# Altium PCB pool_mesurement_PCB.PcbDoc
Units mm, origin at the board's own origin, x right, y up, seen from the top; angles counter-clockwise.
Board outline 60.5 x 41.5 mm, 2 copper layers (Top Layer, Bottom Layer); 36 components, 37 nets, 192 pads, 78 vias.
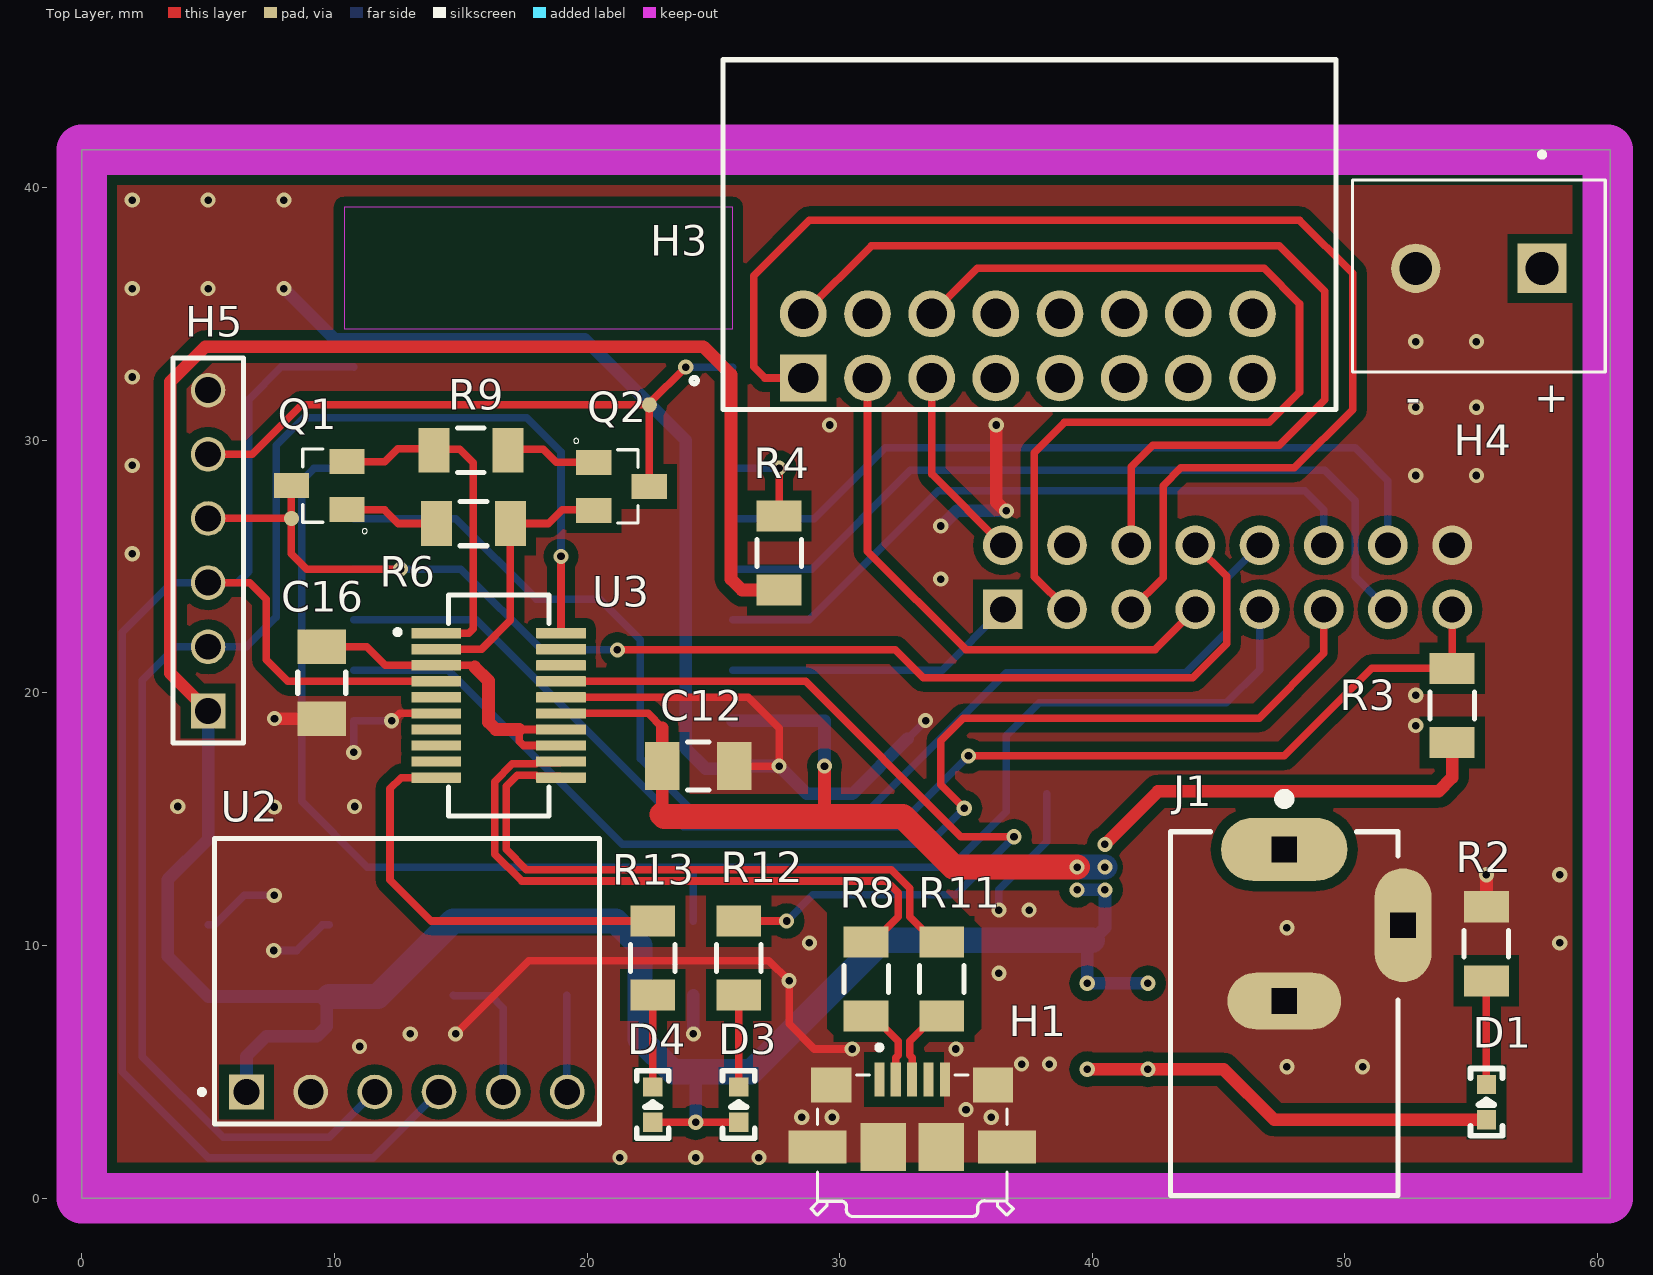
[diagram p0: Top Layer view]
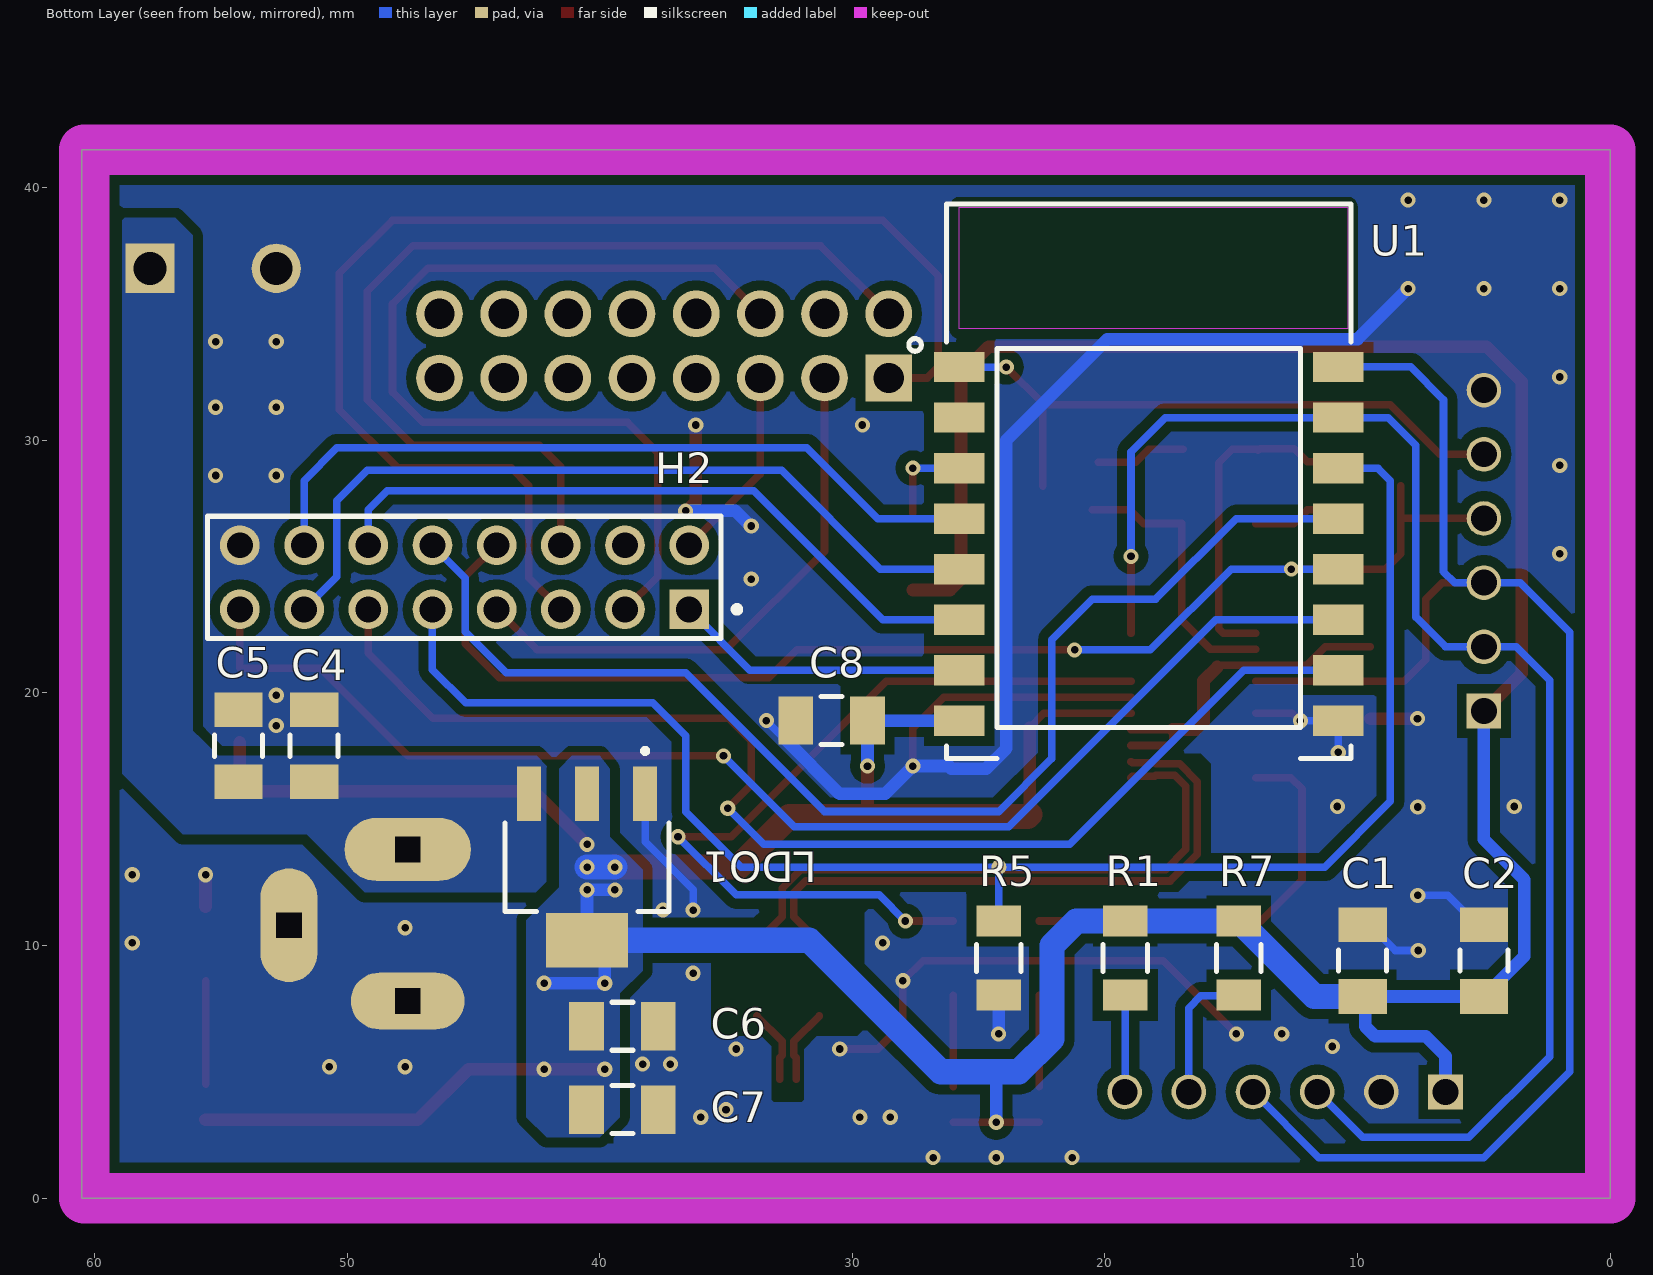
[diagram p1: Bottom Layer view, seen from below]
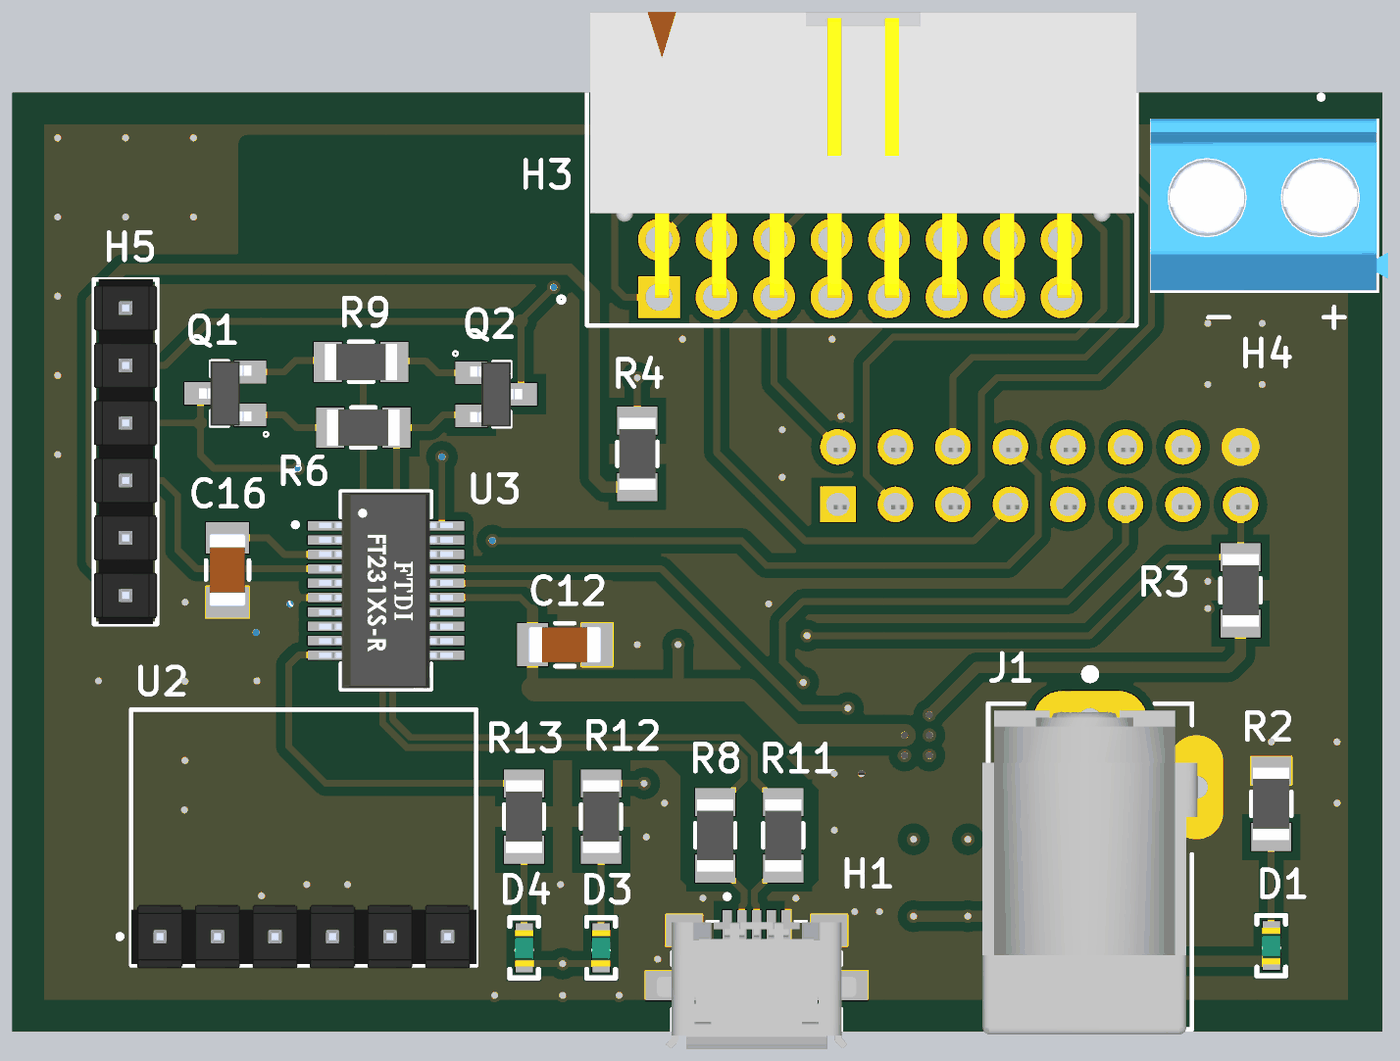
[diagram p2: 3D render of the assembled board from above, using the file's embedded part models]
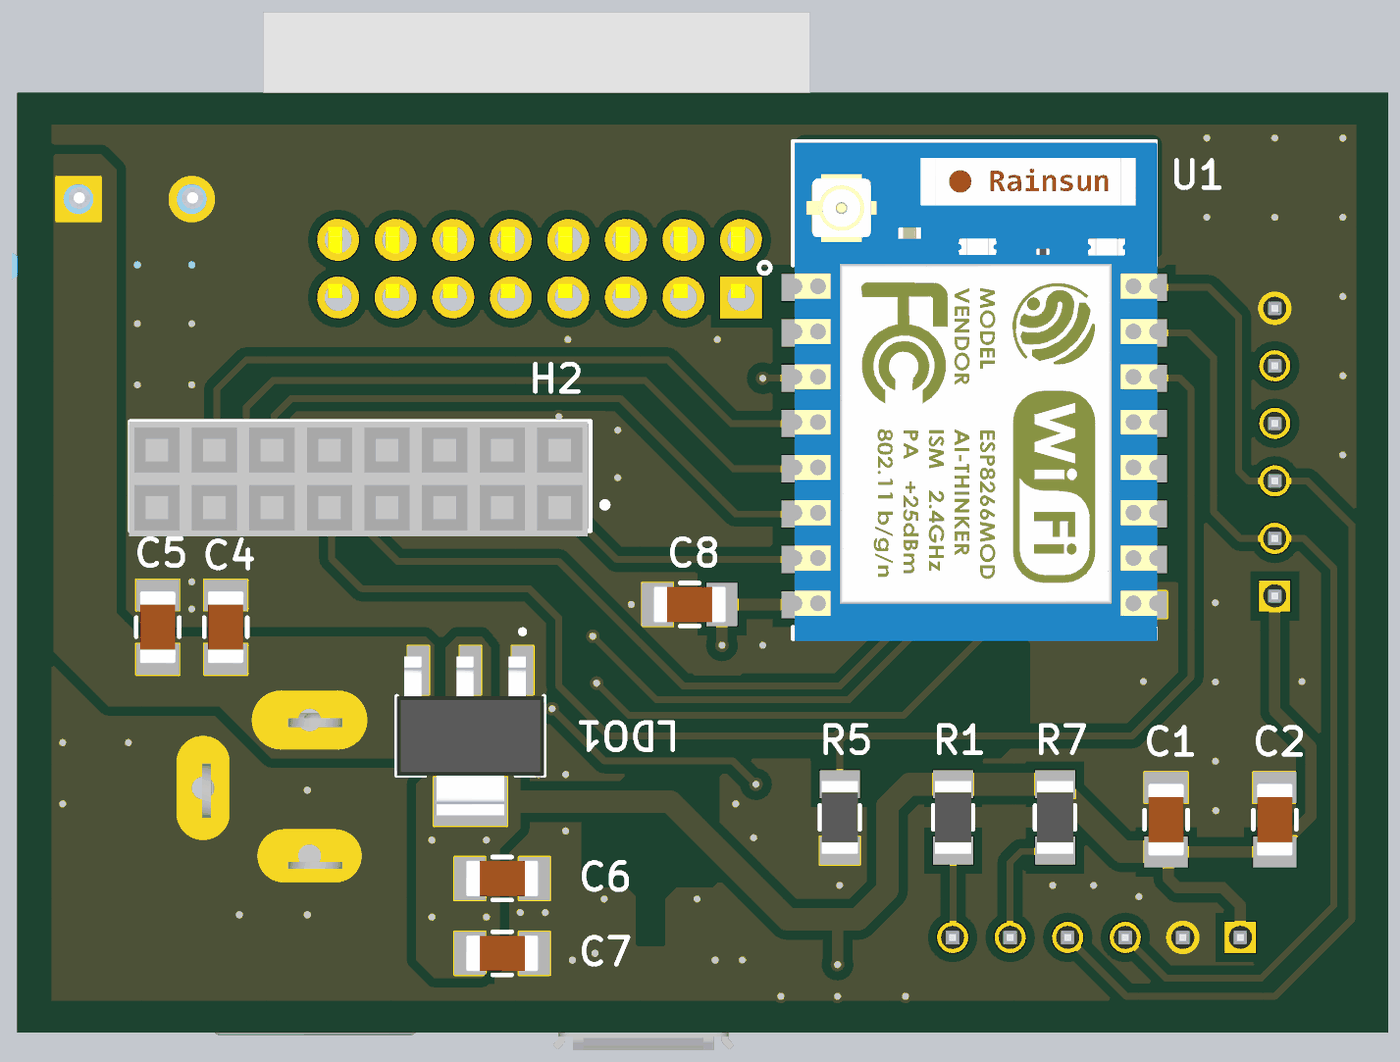
[diagram p3: 3D render of the assembled board from below, using the file's embedded part models]

## Layer stack, top to bottom
Top Solder: solder mask 0.0102, Solder Resist, Dk 3.5
Top Layer: signal copper 0.0356
Dielectric 1: dielectric 0.32, FR-4, Dk 4.8
Bottom Layer: signal copper 0.0356
Bottom Solder: solder mask 0.0102, Solder Resist, Dk 3.5

## Board outline
0,0 0,41.5 60.5,41.5 60.5,0

## Design rules (kind name [scope] priority, off if disabled: settings)
Clearance polyggon [InPolygon] p1: gap=0.4 ignorepadtopadclearanceinfootprint=FALSE
Clearance PAD_TRACK [(IsPad and InComponent('U3')) vs IsTrack] p2: gap=0.15 ignorepadtopadclearanceinfootprint=FALSE
Clearance diff_D [InNet('D_N') vs InNet('D_P') or InNet('NetC16_2')] p3: gap=0.15 ignorepadtopadclearanceinfootprint=FALSE
Clearance diff_USBD [InNet('USBD_N') vs InNet('USBD_P')] p4: gap=0.15 ignorepadtopadclearanceinfootprint=FALSE
Clearance trace_0.3mm [((IsTrack) and (Width=AsMM(0.3)))] p5: gap=0.3 ignorepadtopadclearanceinfootprint=FALSE
Clearance [All] p6: gap=0.01 ignorepadtopadclearanceinfootprint=FALSE
DiffPairsRouting [All] p1: maxlimit=0.254 minlimit=0.15 mostfreqgap=0.15 toplayer_minwidth=0.15 toplayer_maxwidth=0.381 toplayer_prefwidth=0.3 bottomlayer_minwidth=0.15 bottomlayer_maxwidth=0.381 bottomlayer_prefwidth=0.3 maxuncoupledlength=12.7
Height [All] p1: minheight=0 maxheight=50 prefheight=12.7
HoleSize [All] p1: absolutevalues=TRUE maxlimit=4 minlimit=0.025 maxpercent=80.000 minpercent=20.000
HoleToHoleClearance [All] p1: gap=0.2 allowstackedmicrovias=TRUE
MinimumSolderMaskSliver [All] p1: minsoldermaskwidth=0.1
PlaneClearance [All] p1: clearance=0.2
PlaneConnect [All] p1: planeconnectstyle=Direct reliefexpansion=0.508 reliefentries=4 reliefconductorwidth=0.254 reliefairgap=0.254
PolygonConnect PolygonConnect_2 [(IsPad and InNet('3V3'))] p1: connectstyle=Direct reliefconductorwidth=0.254 reliefentries=4 polygonreliefangle="90 Angle" airgapwidth=0.254
PolygonConnect [(IsPad and InNet('NetC4_2'))] p2: connectstyle=Direct reliefconductorwidth=0.254 reliefentries=4 polygonreliefangle="90 Angle" airgapwidth=0.254
PolygonConnect U3_Polygon [(IsPad and InComponent('U3'))] p3: thpad.connectstyle=Direct thpad.reliefconductorwidth=0.254 thpad.reliefentries=4 thpad.polygonreliefangle="90 Angle" thpad.airgapwidth=0.254 smdpad.connectstyle=Direct smdpad.reliefconductorwidth=0.254 smdpad.reliefentries=4 smdpad.polygonreliefangle="90 Angle" smdpad.airgapwidth=0.254 via.connectstyle=Relief via.reliefconductorwidth=0.254 via.reliefentries=4 via.polygonreliefangle="90 Angle" via.airgapwidth=0.254
PolygonConnect PolygonConnect_1 [All] p4: connectstyle=Direct reliefconductorwidth=0.2 reliefentries=4 polygonreliefangle="90 Angle" airgapwidth=0.3
RoutingVias [All] p1: holewidth=0.3 width=0.6 viastyle="Through Hole" minholewidth=0.1 minwidth=0.5 maxholewidth=0.4 maxwidth=1
SilkToSilkClearance [All] p1: silktosilkclearance=0.1
SilkToSolderMaskClearance [IsPad] p1: minsilkscreentomaskgap=0.05 clearancetoexposedcopper=TRUE
SolderMaskExpansion [All] p1: expansion=0.102 istentingtop=FALSE
Width [All] p1: maxlimit=3 minlimit=0.1 preferedwidth=0.3
21 further rules are at their usual default settings.

## Classes and differential pairs
differential pair USBD: +USBD_P -USBD_N
differential pair D: +D_P -D_N

## Components (designator, comment, footprint, x,y, rotation, side; value= is the part's Value field where it differs from the comment)
C1 "220uF" C3216 9.8,9.4 r270 bottom
C2 "2.2uF" C3216 5,9.4 r270 bottom
C4 "10uF" C3216 51.3,17.9 r270 bottom
C5 "0.1uF" C3216 54.3,17.9 r270 bottom
C6 "10uF" C3216 39.1,6.8 r0 bottom
C7 "10uF" C3216 39.1,3.5 r0 bottom
C8 "220uF" C3216 30.821,18.9 r180 bottom
C12 "2.2uF" C3216 24.4,17.1 r180 top
C16 "0.1uF" C3216 9.5,20.4 r90 top
D1 "RED_LED" LED0603-RED 55.6,3.8 r90 top
D3 "LED_BLUE" LED0603-BLUE 26,3.701 r90 top
D4 "LED_GREEN" LED0603-GRENN 22.6,3.701 r90 top
H1 "1981584-1" 1981584-1 32.869,2.024 r0 top
H2 "PPTC082LFBN-RC" PPTC082LFBN-RC 45.363,24.572 r0 bottom
H3 "302-R161" 302-R161 37.45,33.88 r0 top
H4 "TB002-500-02BE" TB002-500-02BE 57.8,36.8 r180 top
H5 "PH1-06-UA" PH1-06-UA 5,19.28 r90 top locked
J1 "PJ-002A" PJ-002A 47.6,13.8 r270 top
LDO1 "TLV1117LV33DCYR" TLV1117LV33DCYR 40.5,13.1 r270 bottom
Q1 "MMBT3904" MMBT3904 9.4,28.2 r90 top
Q2 "MMBT3904" MMBT3904 21.368,28.168 r270 top
R1 "10K" R3216 19.2,9.5 r90 bottom
R2 "1K" R3216 55.6,10.066 r270 top
R3 "10K" R3216 54.24,19.501 r270 top
R4 "10K" R3216 27.6,25.534 r270 top
R5 "10K" R3216 24.2,9.5 r90 bottom
R6 "10K" R3216 15.5,26.7 r0 top
R7 "10K" R3216 14.7,9.5 r90 bottom
R8 "27R" R3216 31.044,8.671 r90 top
R9 "10K" R3216 15.4,29.6 r180 top
R11 "27R" R3216 34.044,8.671 r90 top
R12 "1K" R3216 26,9.5 r90 top
R13 "1K" R3216 22.6,9.5 r90 top
U1 "ESP8266-07" ESP8266-07_MODULE 18.265,25.893 r180 bottom
U2 "GY_BMP280_MODULE" BMP280_MODULE 6.52,4.2 r0 top
U3 "FT231XS-R" FT231XS-R 16.5,19.5 r0 top locked

## Footprints (in the part's own frame and the unit in brackets; to place one, negate y for a bottom-side part, rotate by r counter-clockwise, add the part's x,y. Pads: shape width x height; smd on the part's side, far side on the other; paste and mask are expansions set on the pad)
302-R161 [mm]
  rect 1.85x1.85 hole 1.2 paste-1000 mask+0.05: 1(-8.89,-1.42)
  round 1.85 hole 1.2 paste-1000 mask+0.05: 2(-8.89,1.12) 3(-6.35,-1.42) 4(-6.35,1.12) 5(-3.81,-1.42) 6(-3.81,1.12) 7(-1.27,-1.42) 8(-1.27,1.12) 9(1.27,-1.42) 10(1.27,1.12) 11(3.81,-1.42) 12(3.81,1.12) 13(6.35,-1.42) 14(6.35,1.12) 15(8.89,-1.42) 16(8.89,1.12)
  round 0.2 on Mech4: ""(0,0)
  silkscreen extent -13.33,-2.67 12.19,11.18, body extent -11.94,-1.46 12.19,11.18, height 9.45
1981584-1 [mm]
  rect 0.4x1.35 smd mask+0.05: 1(-1.3,2.675) 2(-0.65,2.675) 3(0,2.675) 4(0.65,2.675) 5(1.3,2.675)
  rect 2.3x1.3 smd mask+0.05: SHLD(-3.75,0) SHLD(3.75,0)
  rect 1.6x1.4 smd mask+0.05: SHLD(-3.2,2.45) SHLD(3.2,2.45)
  rect 1.8x1.9 smd mask+0.05: SHLD(-1.15,0) SHLD(1.15,0)
  round 0.2 on Mech4: ""(0,0)
  silkscreen extent -4,-2.75 4,4.04, body extent -4.4,-2.79 4.4,2.81, height 2.73
BMP280_MODULE [mm]
  rect 1.37x1.37 hole 1.02 mask+0.05: 1(0,0)
  round 1.37 hole 1.02 mask+0.05: 2(2.54,0) 3(5.08,0) 4(7.62,0) 5(10.16,0) 6(12.7,0)
  round 0.2 on Mech4: ""(0,0)
  silkscreen extent -1.87,-1.27 13.97,10.03, body extent -1.35,-1.4 14.1,10, height 5.9
C3216 [mm]
  rect 1.37x1.91 smd mask+0.05: 1(-1.421,0) 2(1.421,0)
  round 0.2 on Mech4: ""(0,0)
  silkscreen extent -0.42,-0.95 0.42,0.95, body extent -1.6,-0.8 1.6,0.8, height 1.9
ESP8266-07_MODULE [mm]
  rect 2x1.2 smd mask+0.05: 1(-7.5,7) 2(-7.5,5) 3(-7.5,3) 4(-7.5,1) 5(-7.5,-1) 6(-7.5,-3) 7(-7.5,-5) 8(-7.5,-7) 9(7.5,-7) 10(7.5,-5) 11(7.5,-3) 12(7.5,-1) 13(7.5,1) 14(7.5,3) 15(7.5,5) 16(7.5,7)
  round 0.2 on Mech4: ""(0,0)
  Keep-Out Layer region: 7.874,8.51 -7.493,8.51 -7.493,13.335 7.874,13.335
  silkscreen extent -9.5,-8.5 8,13.46, body extent -7.93,-8.59 8.07,13.41, height 3.5
FT231XS-R [mm]
  rrect10% 1.97x0.41 smd mask+0.05: 1(-2.47,2.857) 2(-2.47,2.222) 3(-2.47,1.587) 4(-2.47,0.953) 5(-2.47,0.318) 6(-2.47,-0.318) 7(-2.47,-0.953) 8(-2.47,-1.587) 9(-2.47,-2.222) 10(-2.47,-2.857) 11(2.47,-2.857) 12(2.47,-2.222) 13(2.47,-1.587) 14(2.47,-0.953) 15(2.47,-0.318) 16(2.47,0.318) 17(2.47,0.953) 18(2.47,1.587) 19(2.47,2.222) 20(2.47,2.857)
  round 0.2 on Mech4: ""(0,0)
  silkscreen extent -4.1,-4.37 1.99,4.37, body extent -2.96,-4.33 2.96,4.33, height 1.53
LED0603-BLUE [mil]
  rect 30x30 smd mask+1.97: A(-27.5,0) K(27.5,0)
  round 7.87 on Mech4: ""(0,0)
  silkscreen extent -52,-25 52,25, body extent -33,-16 31,16, height 43
LED0603-GRENN [mil]
  rect 30x30 smd mask+1.97: A(-27.5,0) K(27.5,0)
  round 7.87 on Mech4: ""(0,0)
  silkscreen extent -52,-25 52,25, body extent -33,-16 31,16, height 43
LED0603-RED [mil]
  rect 30x30 smd mask+1.97: A(-27.5,0) K(27.5,0)
  round 7.87 on Mech4: ""(0,0)
  silkscreen extent -52,-25 52,25, body extent -33,-16 31,16, height 43
MMBT3904 [mm]
  rect 1x1.4 smd mask+0.05: 1(-0.95,-1.1) 2(0.95,-1.1) 3(0,1.1)
  round 0.2 on Mech4: ""(0,0)
  silkscreen extent -1.9,-1.9 1.45,0.65, body extent -1.43,-1.15 1.43,1.15, height 1.1
PH1-06-UA [mm]
  rect 1.37x1.37 hole 1.02 mask+0.05: 1(0,0)
  round 1.37 hole 1.02 mask+0.05: 2(2.54,0) 3(5.08,0) 4(7.62,0) 5(10.16,0) 6(12.7,0)
  round 0.2 on Mech4: ""(0,0)
  silkscreen extent -1.27,-1.4 13.97,1.4, body extent -1.27,-1.4 13.97,1.4, height 8.6
PJ-002A [mm]
  oval 2.5x5 hole 1 square mask+0.05: 1(0,0)
  oval 2.25x4.5 hole 1 square mask+0.05: 2(6,0)
  oval 4.5x2.25 hole 1 square mask+0.05: 3(3,4.7)
  round 0.2 on Mech4: ""(0,0)
  silkscreen extent -2.2,-4.5 13.7,4.5, body extent -0.38,-4.75 13.92,4.75, height 11.89
PPTC082LFBN-RC [mm]
  rect 1.57x1.57 hole 1.02 paste-1000 mask+0.05: 1(-8.903,1.272)
  round 1.57 hole 1.02 paste-1000 mask+0.05: 2(-8.903,-1.268) 3(-6.363,1.272) 4(-6.363,-1.268) 5(-3.823,1.272) 6(-3.823,-1.268) 7(-1.283,1.272) 8(-1.283,-1.268) 9(1.257,1.272) 10(1.257,-1.268) 11(3.797,1.272) 12(3.797,-1.268) 13(6.337,1.272) 14(6.337,-1.268) 15(8.877,1.272) 16(8.877,-1.268)
  round 0.2 on Mech4: ""(0,0)
  silkscreen extent -10.92,-2.41 10.16,2.41, body extent -10.03,-2.41 10.21,2.67, height 8.7
R3216 [mm]
  rect 1.23x1.77 smd mask+0.05: 1(-1.466,0) 2(1.466,0)
  round 0.2 on Mech4: ""(0,0)
  silkscreen extent -0.53,-0.88 0.53,0.88, body extent -1.6,-0.8 1.6,0.8, height 0.7
TB002-500-02BE [mm]
  rect 1.95x1.95 hole 1.3 mask+0.05: 1(0,0)
  round 1.95 hole 1.3 mask+0.05: 2(5,0)
  silkscreen extent -2.5,-4.6 7.5,4.1, body extent -2.96,-3.56 7.54,4.04, height 10
TLV1117LV33DCYR [mm]
  rect 2.15x0.95 smd mask+0.05: 1(-2.9,2.3) 2(-2.9,0) 3(-2.9,-2.3)
  rect 2.15x3.25 smd mask+0.05: 4(2.9,0)
  round 0.2 on Mech4: ""(0,0)
  silkscreen extent -4.7,-3.25 1.75,3.25, body extent -3.5,-3.25 3.5,3.25, height 1.8

## Part data
C1 C8: library part C_220u_3216, "SMD capacitor X6S(EIA) with capacitance 220uF Tol.20%. Rated voltage 4Vdc 105C", Manufacturer="Murata Electronics", Mfr.PN=GRM31CC80G227ME11L
C2 C12: "±10% 25V Ceramic Capacitor X7R 1206 (3216 Metric)", Manufacturer="Samsung Electro-Mechanics", Mfr.PN=CL31B225KAHNNNE
C4 C6 C7: "-20%, +80% 10V Ceramic Capacitor Y5V (F) 1206 (3216 Metric)", Manufacturer="Samsung Electro-Mechanics", Mfr.PN=CL31F106ZPHNNNE
C5 C16: "±10% 50V Ceramic Capacitor X7R 1206 (3216 Metric)", Manufacturer="Samsung Electro-Mechanics", Mfr.PN=CL31B104KBCNNNC
D1: "Red 630nm LED Indication - Discrete 1.9V 0603 (1608 Metric)", Manufacturer="Würth Elektronik", Mfr.PN=150060SS75000
D3: "Blue 470nm LED Indication - Discrete 3.2V 0603 (1608 Metric)", Manufacturer="Würth Elektronik", Mfr.PN=150060BS75000
D4: "Green 520nm LED Indication - Discrete 3.2V 0603 (1608 Metric)", Manufacturer="Würth Elektronik", Mfr.PN=150060GS75000
H1: "Conn Micro USB 2.0 Type AB RCP 5 POS 0.65mm Solder RA SMD 5 Terminal 1 Port T/R", Manufacturer="TE Connectivity", Mfr.PN=1981584-1
H2: "16 Position Header Connector Through Hole", Manufacturer="Sullins Connector Solutions", ComponentLink1Description=Upverter, ComponentLink1URL=https://upverter.com/upn/revision/f2f20904236b1696/, ComponentLink2Description=Datasheet, ComponentLink2URL=http://cdn.amphenol-icc.com/media/wysiwyg/files/drawing/67996.pdf, Mfr.PN=PPTC082LFBN-RC
H3: "CONN HEADER R/A 16POS 2.54MM", Manufacturer="On Shore Technology Inc.", ComponentLink1Description=Upverter, ComponentLink1URL=https://upverter.com/upn/revision/90d2834b771e9b5c/, ComponentLink2Description=Datasheet, ComponentLink2URL=http://www.on-shore.com/wp-content/uploads/2015/09/ipg33_0.pdf, Mfr.PN=302-R161
H4: "2~24 Poles, Screw Type, Horizontal, 5.0 Pitch, 22~12 _AWG_, Terminal Block Connector", Manufacturer="CUI Devices", Mfr.PN=TB002-500-02BE
H5: "Connector Header Through Hole 6 position 0.100\" (2.54mm)", Manufacturer="Adam Tech", Mfr.PN=PH1-06-UA
J1: "2,0 x 6,5 mm, 2,5 A, Yatay, AÃ§Ä±k Delik, Dc GÃ¼Ã§ JakÄ± KonnektÃ¶rÃ¼", Manufacturer="CUI Devices", Mfr.PN=PJ-002A
LDO1: "1-A, low-dropout voltage regulator 4-SOT-223 -40 to 125", Manufacturer="Texas Instruments", Mfr.PN=TLV1117LV33DCYR
Q1 Q2: "Bipolar _BJT_ Transistor NPN 40V 200mA 270MHz 350mW Surface Mount SOT-23-3", Manufacturer=STMicroelectronics, Mfr.PN=MMBT3904
R1 R3 R4 R5 R6 R7 R9: "10 ±1% 0.25W, 1/4W Chip Resistor 1206 (3216 Metric) Automotive AEC-Q200 Thick Film", Manufacturer=RMCF1206FT10K0, Mfr.PN="Stackpole Electronics Inc"
R2 R12 R13: "1 ±1% 0.25W, 1/4W Chip Resistor 1206 (3216 Metric) Automotive AEC-Q200 Thick Film", Manufacturer="Stackpole Electronics Inc", Mfr.PN=RMCF1206FT1K00
R8 R11: "27 ±5% 0.25W, 1/4W Chip Resistor 1206 (3216 Metric) Automotive AEC-Q200 Thick Film", Manufacturer="Stackpole Electronics Inc", Mfr.PN=RMCF1206JT27R0
U1: "self-contained Wi-Fi network solution", Manufacturer="Reland Sung", Mfr.PN=722704676397
U2: "environmental sensor with temperature, barometric pressure", Manufacturer=KOOBOOK, Mfr.PN=KB039
U3: "USB Bridge, USB to UART USB 2.0 UART Interface 20-SSOP", Manufacturer=FTDI, Mfr.PN=FT231XS-R

## Free pads (board coordinates)
  round 0.6 smd paste-10 mask-10: ""(8.3,26.9) ""(22.468,31.4)
  round 0.6 smd far side paste-10 mask-10: ""(24.2,13.1)

## Via types
v1: diameter 0.6, hole 0.3, Top Layer to Bottom Layer, 78 vias

## Nets (pads, with @x,y where several pads share a name; then routed paths per layer and width w, separated by ;. In a path a pad name is that pad's centre, name@x,y a point inside that pad or via, vN(x,y) a via of type N, cw(c..) or ccw(c..) an arc to the next point about the centre after c; other vN are vias at no path point)
3V3: C1.2 C2.2 C6.2 C7.2 C8.2 C12.2 D1.A D3.A D4.A H5.1 LDO1.2 LDO1.4 R1.2 R3.2 R4.2 R7.2 U1.8 U2.1 U3.15 | length 188.2
  Top Layer w0.3: U3.15 22.418,19.182 22.979,18.621 ; D4.A v1(24.3,3.003) D3.A
  Top Layer w0.5: H5.1 3.5,20.78 3.5,32.3 4.9,33.7 24.6,33.7 25.7,32.6 25.7,24.5 26.132,24.068 R4.2 ; 22.979,15.179 C12.2 22.979,18.621 ; 29.4,15.1 v1(29.4,17.1) ; v1(39.8,5.1) v1(42.2,5.1) 45.2,5.1 47.199,3.102 D1.A ; v1(40.5,14) 42.6,16.1 53.7,16.1 54.24,16.64 R3.2
  Top Layer w1: 22.979,15.179 23.058,15.1 29.4,15.1 32.5,15.1 34.5,13.1 v1(39.4,13.1)
  Bottom Layer w0.5: H5.1 5,14.2 3.4,12.6 3.4,9.579 C2.2 C1.2 9.7,7.879 9.7,6.8 9.3,6.4 7.3,6.4 6.52,5.62 U2.1 ; v1(24.3,3.003) 24.3,4.9 ; U1.8@25.758,18.9 C8.2 v1(29.4,17.1) ; v1(39.4,12.2) v1(40.5,12.2) 40.5,10.7 40,10.2 39.8,10 v1(39.8,8.5) v1(42.2,8.5)
  Bottom Layer w1: C1.2 11.713,7.979 R7.2 R1.2 21.134,10.966 22.1,10 22.1,6.3 23.4,5 26.5,5 31.7,10.2 LDO1.4@40,10.2 ; v1(39.4,13.1) v1(40.5,13.1)
CH_PD: R4.1 U1.3 | length 3.6
  Top Layer w0.3: R4.1@27.6,27.1 v1(27.6,28.893)
  Bottom Layer w0.3: U1.3 v1(27.6,28.893)
D_N: R8.2 U3.12 | length 24.8
  Top Layer w0.3: U3.12 18.915,17.222 18.025,17.222 17.987,17.185 17.049,17.185 16.35,16.486 16.35,13.614 17.414,12.55 18.426,12.55 31.85,12.55 32.319,12.081 32.319,11.142 R8.2@31.314,10.137
D_P: R11.2 U3.11 | length 24
  Top Layer w0.3: U3.11 18.915,16.698 18.025,16.698 17.987,16.735 17.235,16.735 16.8,16.3 16.8,13.8 17.6,13 32.036,13 32.769,12.267 32.769,11.142 R11.2@33.774,10.137
GND: C1.1 C2.1 C4.1 C5.1 C6.1 C7.1 C8.1 C12.1 C16.1 H1.5 H1.SHLD H2.16 H4.2 H5.6 J1.2 J1.3 LDO1.1 R2.1 R5.1 U1.9 U2.2 U3.6 U3.16 | length 100.9
  Top Layer w0.3: v1(12.265,18.893) 12.305,18.893 12.595,19.182 U3.6 ; v1(14.8,6.5) 17.7,9.4 27.2,9.4 v1(28,8.6) 28,6.9 29,5.9 v1(30.5,5.9) ; U3.16 26.383,19.817 27.6,18.6 v1(27.6,17.1) C12.1
  Top Layer w0.5: v1@7.621,18.979 v1(7.628,18.979) C16.1 ; v1(36.2,30.6) 36.2,27.543 36.493,27.25 36.523,27.25 36.573,27.2 v1(36.6,27.2) ; R2.1 v1(55.6,12.8)
  Bottom Layer w0.3: C2.1 5.27,10.821 6.428,11.979 v1(7.621,11.979) ; v1(7.6,9.8) 8.509,9.8 9.53,10.821 C1.1 ; v1@10.758,17.642 U1.9@10.758,18.9 ; U1.9 v1(12.265,18.893) v1@12.4,18.893 ; C8.1@32.686,18.186 v1(33.4,18.9) ; v1(36.3,11.4) 36.3,12.2 38.2,14.1 LDO1.1
  Bottom Layer w0.5: v1(8,36) 10,34 19.9,34 23.9,30 23.9,17.8 24.7,17 26.086,17 26.186,17.1 v1(27.6,17.1) 28.7,16 30.5,16 C8.1@32.686,18.186 ; v1@24.2,6.5 R5.1 ; v1(34,26.6) 34.027,26.6 34.627,27.2 v1(36.6,27.2)
  other v1: 21.3,1.6 24.3,1.6 26.8,1.6 28.5,3.2 29.7,3.2 36,3.2 35,3.5 47.7,5.2 50.7,5.2 37.2,5.3 38.3,5.3 34.6,5.9 11,6 13,6.5 24.207,6.5 36.3,8.9 28.8,10.1 58.5,10.1 47.7,10.7 37.5,11.4 58.5,12.8 7.621,15.479 3.8,15.5 10.8,15.5 10.765,17.642 52.8,18.7 52.8,19.9 34,24.5 2,25.5 52.8,28.6 55.2,28.6 2,29 29.6,30.6 52.8,31.3 55.2,31.3 2,32.5 52.8,33.9 55.2,33.9 2,36 5,36 2,39.5 5,39.5 8,39.5
GPIO0: H2.8 H5.4 pad.@8.3,26.9 Q1.3 U1.12 | length 51.9
  Top Layer w0.3: H5.4 pad.@8.3,26.9 ; Q1.3 pad.@8.3,26.9 ; v1(12.623,24.893) 8.907,24.893 8.3,25.5 pad.@8.3,26.9 ; v1(21.2,21.7) 32.2,21.7 33.3,20.6 43.971,20.6 45.316,21.945 45.316,24.604 H2.8
  Bottom Layer w0.3: U1.12 v1(12.623,24.893) 15.007,24.893 18.2,21.7 v1(21.2,21.7)
GPIO2: H2.15 R3.1 U1.11 | length 51.8
  Top Layer w0.3: v1(35.1,17.5) 47.6,17.5 51.067,20.967 R3.1 H2.15
  Bottom Layer w0.3: U1.11 15.607,22.893 23.8,14.7 32.3,14.7 v1(35.1,17.5)
GPIO4: H2.10 U1.13 | length 49
  Bottom Layer w0.3: U1.13 14.807,26.893 18,23.7 20.5,23.7 22.1,22.1 22.1,17.4 24.2,15.3 31.1,15.3 36.6,20.8 43.7,20.8 45.319,22.419 45.319,24.539 H2.10
GPIO5: H2.9 pad.@24.2,13.1 R5.2 U1.14 | length 63.5
  Bottom Layer w0.3: U1.14 9.193,28.893 8.7,28.4 8.7,15.7 11.3,13.1 20.8,13.1 pad.@24.2,13.1 ; R5.2 pad.@24.2,13.1 ; H2.9 46.62,20.92 45.3,19.6 37.9,19.6 36.6,18.3 36.6,15.3 34.4,13.1 pad.@24.2,13.1
GPIO12: H2.12 U1.6 | length 27.2
  Bottom Layer w0.3: U1.6 28.793,22.893 33.9,28 48.4,28 49.16,27.24 H2.12
GPIO13: H2.1 U1.7 | length 11.7
  Bottom Layer w0.3: U1.7 34.053,20.893 H2.1
GPIO14: H2.13 U1.5 | length 31.6
  Bottom Layer w0.3: U1.5 28.893,24.893 32.8,28.8 49.2,28.8 50.4,27.6 50.4,24.6 H2.13
GPIO15: H2.11 U1.10 | length 49
  Top Layer w0.3: v1(34.93,15.43) 34,16.361 34,18.1 34.9,19 46.6,19 49.16,21.56 H2.11
  Bottom Layer w0.3: U1.10 14.507,20.893 21.4,14 33.5,14 v1(34.93,15.43)
GPIO16: H2.14 U1.4 | length 30.2
  Bottom Layer w0.3: U1.4 28.993,26.893 31.8,29.7 50.4,29.7 51.7,28.4 H2.14
NetC16_2: C16.2 U3.3 U3.13 U3.14 | length 13.9
  Top Layer w0.3: C16.2 11.279,21.821 12.013,21.087 U3.3 15.422,21.087 15.487,21.023 ; U3.13 17.487,17.912 17.31,18.09 17.31,18.547 U3.14
  Top Layer w0.5: 15.552,21.023 16.1,20.475 16.1,18.84 16.393,18.547 17.31,18.547
NetD1_K: D1.K R2.2 | length 4.1
  Top Layer w0.3: D1.K R2.2
NetD3_K: D3.K R12.1 | length 3.6
  Top Layer w0.3: D3.K R12.1
NetD4_K: D4.K R13.1 | length 3.6
  Top Layer w0.3: D4.K R13.1
NetH2_2: H2.2 H3.5 | length 7.8
  Top Layer w0.3: H3.5 33.64,28.66 H2.2
NetH2_3: H2.3 H3.6 | length 37.6
  Top Layer w0.3: H3.6 35.44,36.8 46.8,36.8 48.2,35.4 48.2,31.9 47,30.7 38.9,30.7 37.7,29.5 37.7,24.6 H2.3
NetH2_5: H2.5 H3.1 | length 50.8
  Top Layer w0.3: H3.1 27.04,32.46 26.6,32.9 26.6,36.5 28.8,38.7 48.2,38.7 50.3,36.6 50.3,31.2 48,28.9 43.5,28.9 42.8,28.2 42.8,24.56 H2.5
NetH2_6: H2.6 H3.2 | length 38.7
  Top Layer w0.3: H3.2 31.26,37.7 47.4,37.7 49.2,35.9 49.2,31.6 47.4,29.8 42.4,29.8 41.54,28.94 H2.6
NetH2_7: H2.7 H3.3 | length 22.1
  Top Layer w0.3: H3.3 31.1,25.6 35,21.7 42.48,21.7 H2.7
NetQ1_1: Q1.1 R6.1 | length 3.8
  Top Layer w0.3: Q1.1 11.982,27.25 12.532,26.7 R6.1
NetQ1_2: Q1.2 R9.2 U3.1 | length 13.6
  Top Layer w0.3: Q1.2 11.988,29.15 12.503,29.665 13.869,29.665 R9.2 ; R9.2@13.902,29.632 14.968,29.632 15.5,29.1 15.5,22.533 15.324,22.357 U3.1
NetQ2_1: Q2.1 R9.1 | length 3.6
  Top Layer w0.3: R9.1@16.898,29.632 18.265,29.632 18.78,29.118 Q2.1
NetQ2_2: Q2.2 R6.2 U3.2 | length 11
  Top Layer w0.3: U3.2 15.822,21.722 16.966,22.866 R6.2 18.468,26.7 19.018,27.25 Q2.2@20.5,27.25
NetR1_1: R1.1 U2.6 | length 3.8
  Bottom Layer w0.3: R1.1 19.2,4.22 U2.6
NetR7_1: R7.1 U2.5 | length 5.5
  Bottom Layer w0.3: R7.1 14.734,8 16.2,8 16.68,7.52 U2.5
NetR12_2: R12.2 U3.17 | length 32.8
  Top Layer w0.3: U3.17 28.647,20.452 34.8,14.3 v1(36.9,14.3) ; R12.2 v1(27.9,10.966)
  Bottom Layer w0.3: v1(27.9,10.966) 28.934,12 34.6,12 v1(36.9,14.3)
NetR13_2: R13.2 U3.10 | length 16.7
  Top Layer w0.3: U3.10 12.642,16.642 12.2,16.2 12.2,12.6 13.834,10.966 R13.2
RESET: H5.5 pad.@22.468,31.4 Q2.3 U1.1 | length 25.5
  Top Layer w0.3: H5.5 6.74,29.44 8.7,31.4 pad.@22.468,31.4 ; Q2.3 22.468,31.454 v1(23.907,32.893)
  Bottom Layer w0.3: v1(23.907,32.893) U1.1
RXD: H5.2 U1.15 U2.3 U3.20 | length 58.8
  Top Layer w0.3: U3.20 v1(18.97,25.4)
  Bottom Layer w0.3: U2.3 9.8,2.4 5.6,2.4 2.4,5.6 2.4,20.5 3.72,21.82 H5.2 6.52,21.82 7.7,23 7.7,29.8 8.793,30.893 U1.15 17.607,30.893 18.97,29.53 v1(18.97,25.4)
TXD: H5.3 U1.16 U2.4 U3.4 | length 62
  Top Layer w0.3: H5.3 6.64,24.36 7.3,23.7 7.3,21.3 8.148,20.452 U3.4
  Bottom Layer w0.3: U1.16 10.758,32.9 7.9,32.9 6.6,31.6 6.6,24.8 6.16,24.36 H5.3 3.56,24.36 1.6,22.4 1.6,5 5,1.6 11.54,1.6 U2.4
USBD_N: H1.2 R8.1 | length 3
  Top Layer w0.3: R8.1@31.314,7.205 32.319,6.2 32.319,5.66 32.219,5.56 H1.2
USBD_P: H1.3 R11.1 | length 3
  Top Layer w0.3: H1.3 32.869,5.56 32.769,5.66 32.769,6.2 R11.1@33.774,7.205
VIN: C4.2 C5.2 H4.1 J1.1 LDO1.3
pads on no net: C1. C2. C4. C5. C6. C7. C8. C12. C16. D1. D3. D4. H1. H1.1 H1.4 H2. H2.4 H3. H3.4 H3.7 H3.8 H3.9 H3.10 H3.11 H3.12 H3.13 H3.14 H3.15 H3.16 H5. J1. LDO1. Q1. Q2. R1. R2. R3. R4. R5. R6. R7. R8. R9. R11. R12. R13. U1. U1.2 U2. U3. U3.5 U3.7 U3.8 U3.9 U3.18 U3.19

## Polygon pours and split planes (outlines as drawn)
GND on Bottom Layer "GND_L02_P006" (solid, remove dead copper, pour order 6): 0,41.5 60.5,41.5 60.5,0 0,0
GND on Bottom Layer "GND_L02_P004" (solid, remove dead copper, pour order 4): 36.8,8.3 38.3,8.3 38.7,7.9 38.7,2.2 38.1,1.6 34.9,1.6 34.6,1.9 34.6,4.9 34.9,5.2 36,5.2 36.5,5.7 36.5,8
3V3 on Bottom Layer "3V3_L02_P001" (solid, remove dead copper, pour order 1): 40,17.5 41.1,17.5 41.6,17 41.6,12.3 42.9,11 42.9,3.2 42.1,2.4 40,2.4 39.2,3.2 39.2,8.1 38.3,9 38.3,13 39.6,14.3 39.6,17
VIN on Bottom Layer "VIN_L02_P000" (solid, remove dead copper, pour order 0): 42,17 42.5,17.5 55.1,17.5 56.1,18.5 56.1,38.1 56.8,38.8 58.8,38.8 59.5,38.1 59.5,17.4 56.5,14.4 51.6,14.4 49.3,12.1 42.5,12.1 42,12.6
GND on Top Layer "GND_L01_P005" (solid, remove dead copper, pour order 5): 0,41.5 60.5,41.5 60.5,0 0,0

## Keep-outs
Keep-Out Layer:
  lines w2: 0,0 0,41.5 60.4,41.5 60.4,0 0,0

## Other copper
Top Layer:
  pour cut-out: 20.1,17.6 20.2,17.5 20.2,16.3 20.1,16.2 17.6,16.2 17.4,16 17.4,13.9 17.9,13.4 32.9,13.4 35.6,10.7 35.6,6.7 35.3,6.4 33.6,6.4 33.2,6 33.2,3.9 33.1,3.8 32,3.8 31.9,3.9 31.9,5.9 31.4,6.4 29.8,6.4 29.5,6.7 29.5,11.3 28.7,12.1 17.1,12.1 15.8,13.4 15.8,17.2 16.2,17.6
Bottom Layer:
  region net 3V3: 39.8,8.5
  pour cut-out: 20.1,17.6 20.2,17.5 20.2,16.3 20.1,16.2 17.6,16.2 17.4,16 17.4,13.9 17.9,13.4 32.5,13.4 33.5,12.4 33.5,11.5 33.9,11.1 35,11.1 35.6,10.5 35.6,6.7 35.3,6.4 33.6,6.4 33.2,6 33.2,3.9 33.1,3.8 32,3.8 31.9,3.9 31.9,5.9 31.4,6.4 29.8,6.4 29.5,6.7 29.5,11.3 28.7,12.1 17.1,12.1 15.8,13.4 15.8,17.2 16.2,17.6

## Silkscreen, mask and mechanical layers (free items; w line width, h text height)
Top Overlay:
  text "-" at 52.4,31.1 h1.2
  text "+" at 57.5,31.1 h1.2
Top Solder:
  lines w2: -1,-1 -1,42.516 61.5,42.5 61.5,-1.016 -1,-1
Bottom Solder:
  lines w2: -1,-1 61.5,-1.016 61.5,42.5 -1,42.516 -1,-1
Mechanical 1:
  the board outline again, w0.1
Mechanical 12:
  lines w0.381: 70.776,20.008 94.392,20.008 116.23,20.008 132.735,20.008 147.21,20.008 159.145,20.008 169.557,20.008 ; 70.776,23.056 94.392,23.056 116.23,23.056 132.735,23.056 147.21,23.056 159.145,23.056 169.557,23.056 ; 70.776,26.104 94.392,26.104 116.23,26.104 132.735,26.104 147.21,26.104 159.145,26.104 169.557,26.104 ; 70.776,29.152 94.392,29.152 116.23,29.152 132.735,29.152 147.21,29.152 159.145,29.152 169.557,29.152 ; 70.776,32.2 94.392,32.2 116.23,32.2 132.735,32.2 147.21,32.2 159.145,32.2 169.557,32.2 ; 70.776,35.248 94.392,35.248 116.23,35.248 132.735,35.248 147.21,35.248 159.145,35.248 169.557,35.248 ; 70.776,38.296 169.557,38.296 ; 94.392,41.344 94.392,16.96 ; 116.23,41.344 116.23,16.96 ; 132.735,41.344 132.735,16.96 ; 147.21,41.344 147.21,16.96 ; 159.145,41.344 159.145,16.96 ; 94.392,16.96 70.776,16.96 70.776,41.344 169.557,41.344 169.557,16.96 159.145,16.96 ; 94.392,16.96 116.23,16.96 ; 116.23,16.96 132.735,16.96 ; 132.735,16.96 147.21,16.96 ; 147.21,16.96 159.145,16.96
  text "Name" at 72.554,39.058 h1.52
  text "Material" at 96.17,39.058 h1.52
  text "Thickness" at 118.008,39.058 h1.52
  text "Constant" at 134.513,39.058 h1.52
  text "Gerber" at 148.988,39.058 h1.52
  text "Layer" at 160.923,39.058 h1.52
  text "Top Overlay" at 72.554,36.01 h1.52
  text "GTO" at 148.988,36.01 h1.52
  text "Top Solder" at 72.554,32.962 h1.52
  text "Solder Resist" at 96.17,32.962 h1.52
  text "0.40mil" at 118.008,32.962 h1.52
  text "3.5" at 134.513,32.962 h1.52
  text "GTS" at 148.988,32.962 h1.52
  text "Top Layer" at 72.554,29.914 h1.52
  text "Copper" at 96.17,29.914 h1.52
  text "1.40mil" at 118.008,29.914 h1.52
  text "GTL" at 148.988,29.914 h1.52
  text "1" at 160.923,29.914 h1.52
  text "Dielectric 1" at 72.554,26.866 h1.52
  text "FR-4" at 96.17,26.866 h1.52
  text "12.60mil" at 118.008,26.866 h1.52
  text "4.8" at 134.513,26.866 h1.52
  text "Bottom Layer" at 72.554,23.818 h1.52
  text "Copper" at 96.17,23.818 h1.52
  text "1.40mil" at 118.008,23.818 h1.52
  text "GBL" at 148.988,23.818 h1.52
  text "2" at 160.923,23.818 h1.52
  text "Bottom Solder" at 72.554,20.77 h1.52
  text "Solder Resist" at 96.17,20.77 h1.52
  text "0.40mil" at 118.008,20.77 h1.52
  text "3.5" at 134.513,20.77 h1.52
  text "GBS" at 148.988,20.77 h1.52
  text "Bottom Overlay" at 72.554,17.722 h1.52
  text "GBO" at 148.988,17.722 h1.52
  text "Total board thickness:" at 72.554,14.674 h1.52
  text "16.20mil" at 118.008,14.674 h1.52
Drill Drawing:
  circle w0.254: c73.553,-14.193 r0.847
  lines w0.254: 72.707,-18.85 74.4,-18.85 74.4,-17.157 72.707,-17.157 72.707,-18.85 ; 72.707,-9.537 74.4,-9.537 73.553,-11.23 72.707,-9.537 ; 72.707,-6.997 73.13,-6.997 73.13,-7.42 73.977,-7.42 73.977,-6.997 74.4,-6.997 74.4,-6.15 73.977,-6.15 73.977,-5.727 73.13,-5.727 73.13,-6.15 72.707,-6.15 72.707,-6.997 ; 72.707,-3.187 73.13,-3.187 73.553,-3.61 73.977,-3.187 74.4,-3.187 73.977,-2.763 74.4,-2.34 73.977,-2.34 73.553,-1.917 73.13,-2.34 72.707,-2.34 73.13,-2.763 72.707,-3.187 ; 72.707,0.2 73.553,0.623 74.4,0.2 73.977,1.047 74.4,1.893 73.553,1.47 72.707,1.893 73.13,1.047 72.707,0.2
  lines w0.381: 71.188,-19.993 156.815,-19.993 ; 71.188,2.867 156.815,2.867 ; 85.18,-23.803 85.18,6.677 ; 100.162,-23.803 100.162,6.677 ; 127.84,-23.803 127.84,6.677 ; 140.689,-23.803 140.689,6.677 ; 71.188,-23.803 156.815,-23.803 156.815,6.677 71.188,6.677 71.188,-23.803
  text "Symbol" at 73.474,4.01 h1.83
  text "Count" at 86.323,4.01 h1.83
  text "Hole Size" at 101.305,4.01 h1.83
  text "Plated" at 128.983,4.01 h1.83
  text "Via/Pad" at 141.832,4.01 h1.83
  text "78" at 86.323,0.2 h1.52
  text "11.81mil (0.300mm)" at 101.305,0.2 h1.52
  text "PTH" at 128.983,0.2 h1.52
  text "Via" at 141.832,0.2 h1.52
  text "2" at 86.323,-3.61 h1.52
  text "39.37mil (1.000mm)" at 101.305,-3.61 h1.52
  text "PTH" at 128.983,-3.61 h1.52
  text "Pad" at 141.832,-3.61 h1.52
  text "1" at 86.323,-7.42 h1.52
  text "39.37mil (1.000mm)" at 101.305,-7.42 h1.52
  text "PTH" at 128.983,-7.42 h1.52
  text "Pad" at 141.832,-7.42 h1.52
  text "28" at 86.323,-11.23 h1.52
  text "40.16mil (1.020mm)" at 101.305,-11.23 h1.52
  text "PTH" at 128.983,-11.23 h1.52
  text "Pad" at 141.832,-11.23 h1.52
  text "16" at 86.323,-15.04 h1.52
  text "47.24mil (1.200mm)" at 101.305,-15.04 h1.52
  text "PTH" at 128.983,-15.04 h1.52
  text "Pad" at 141.832,-15.04 h1.52
  text "2" at 86.323,-18.85 h1.52
  text "51.18mil (1.300mm)" at 101.305,-18.85 h1.52
  text "PTH" at 128.983,-18.85 h1.52
  text "Pad" at 141.832,-18.85 h1.52
  text "127 Total" at 86.323,-22.66 h1.52
  text "Slot definitions :" at 73.474,-26.342 h1.52
  text "Routed Path Length" at 99.704,-26.342 h1.52
  text "= Calculated from tool start centre position to tool end centre position." at 127.712,-26.342 h1.52
  text "Hole Length" at 99.704,-28.882 h1.52
  text "= Routed Path Length + Tool Size = Slot length as defined in the PCB layout" at 117.301,-28.882 h1.52

## Dimensions
0,0 to 0,41.5 on Mechanical 12
0,0 to 60.5,0 on Mechanical 12